# EAGLE board Top pHAT-Panel (EAGLE 9.6.2), part 1 of 2
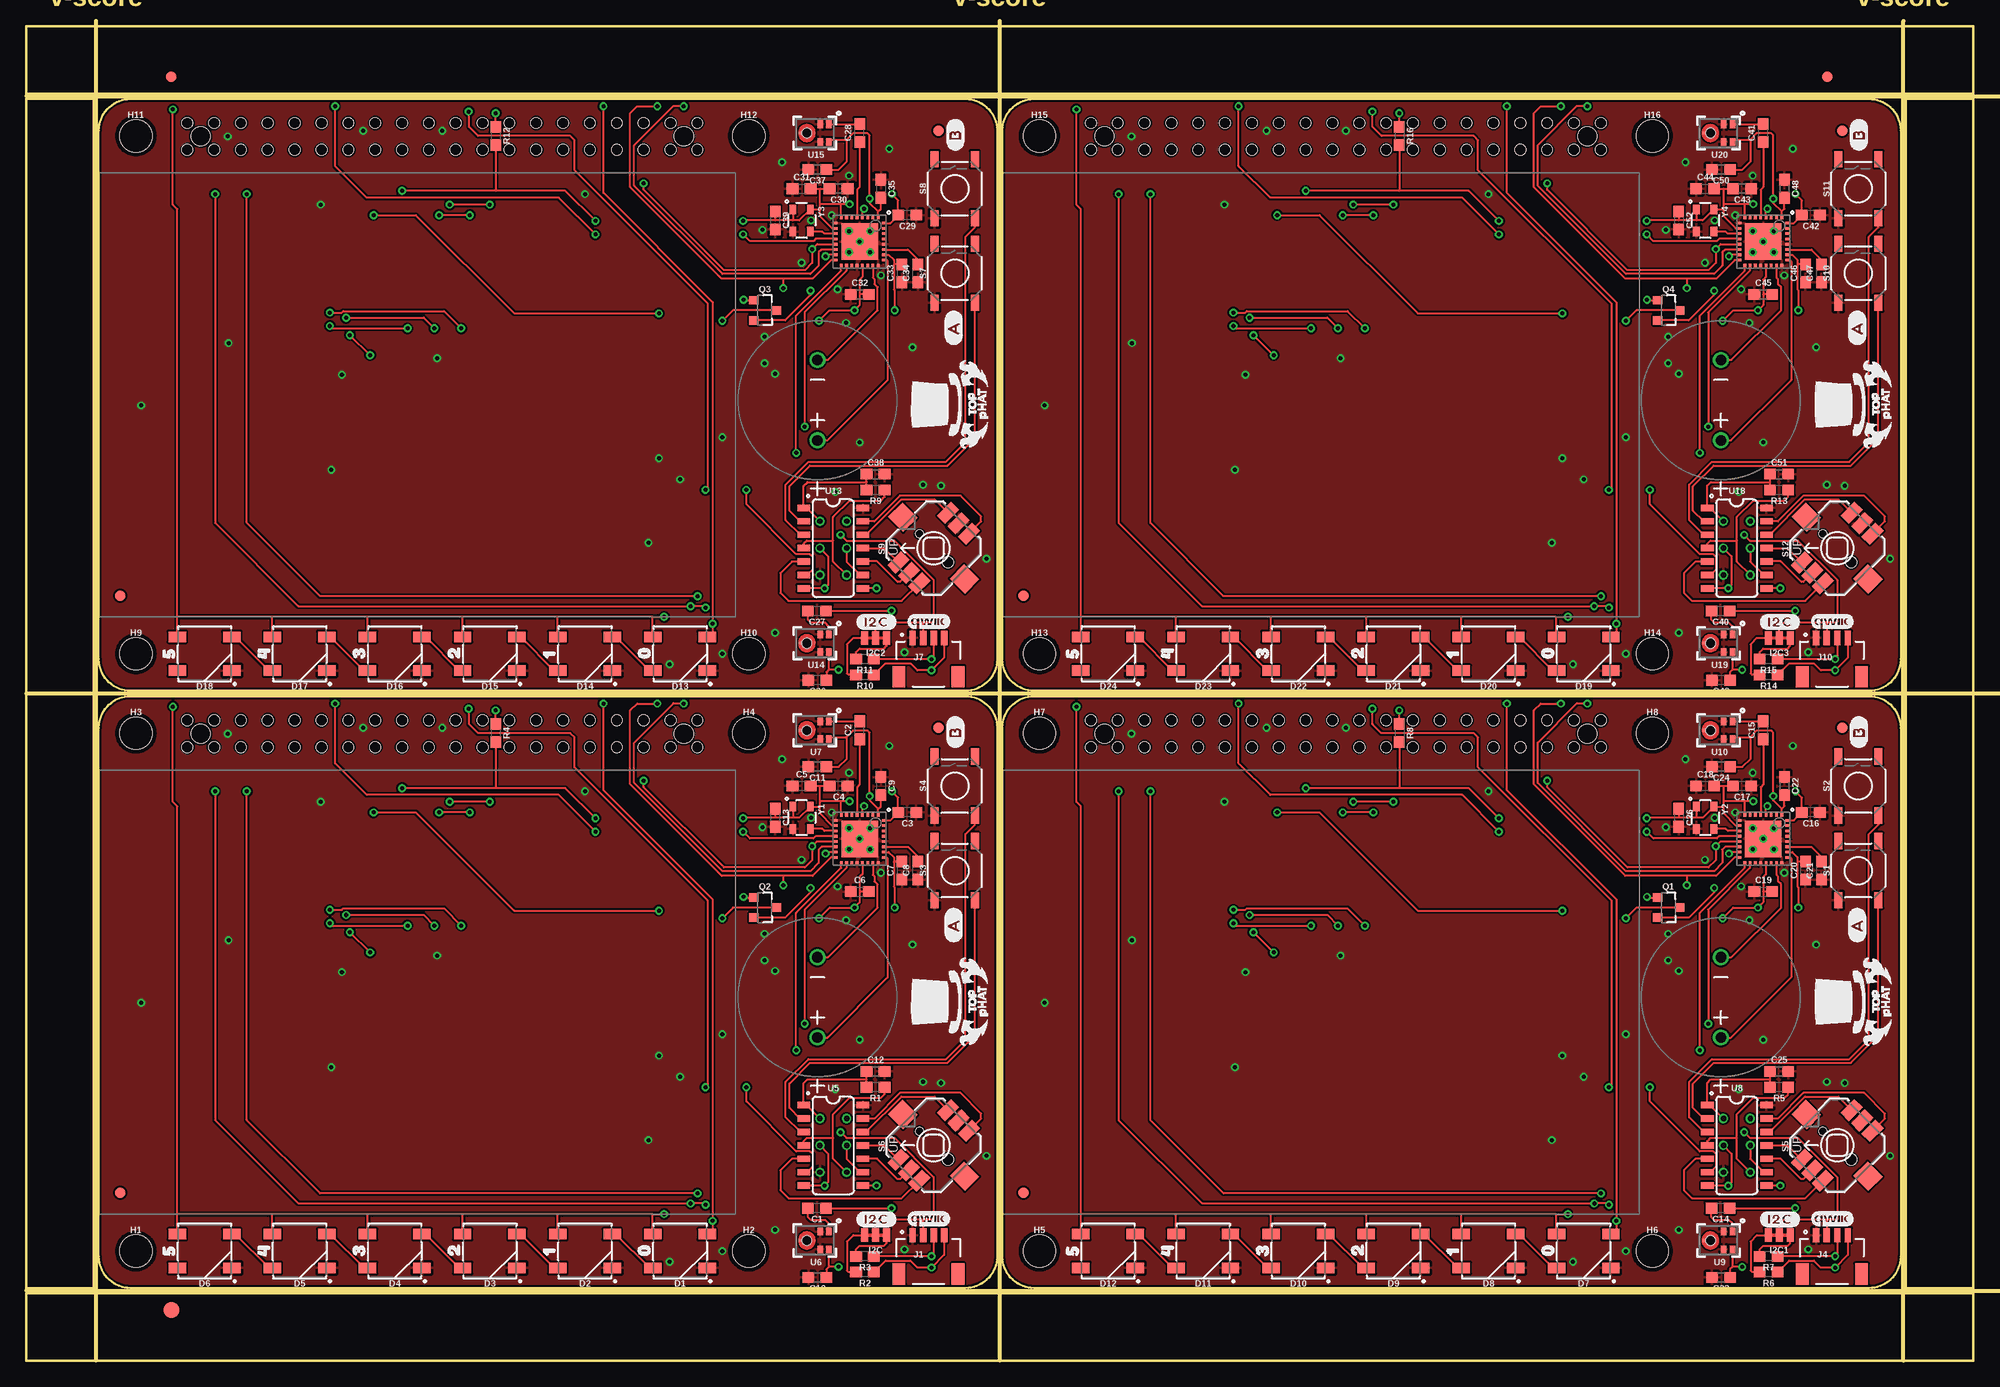
[diagram p0: board, top side]
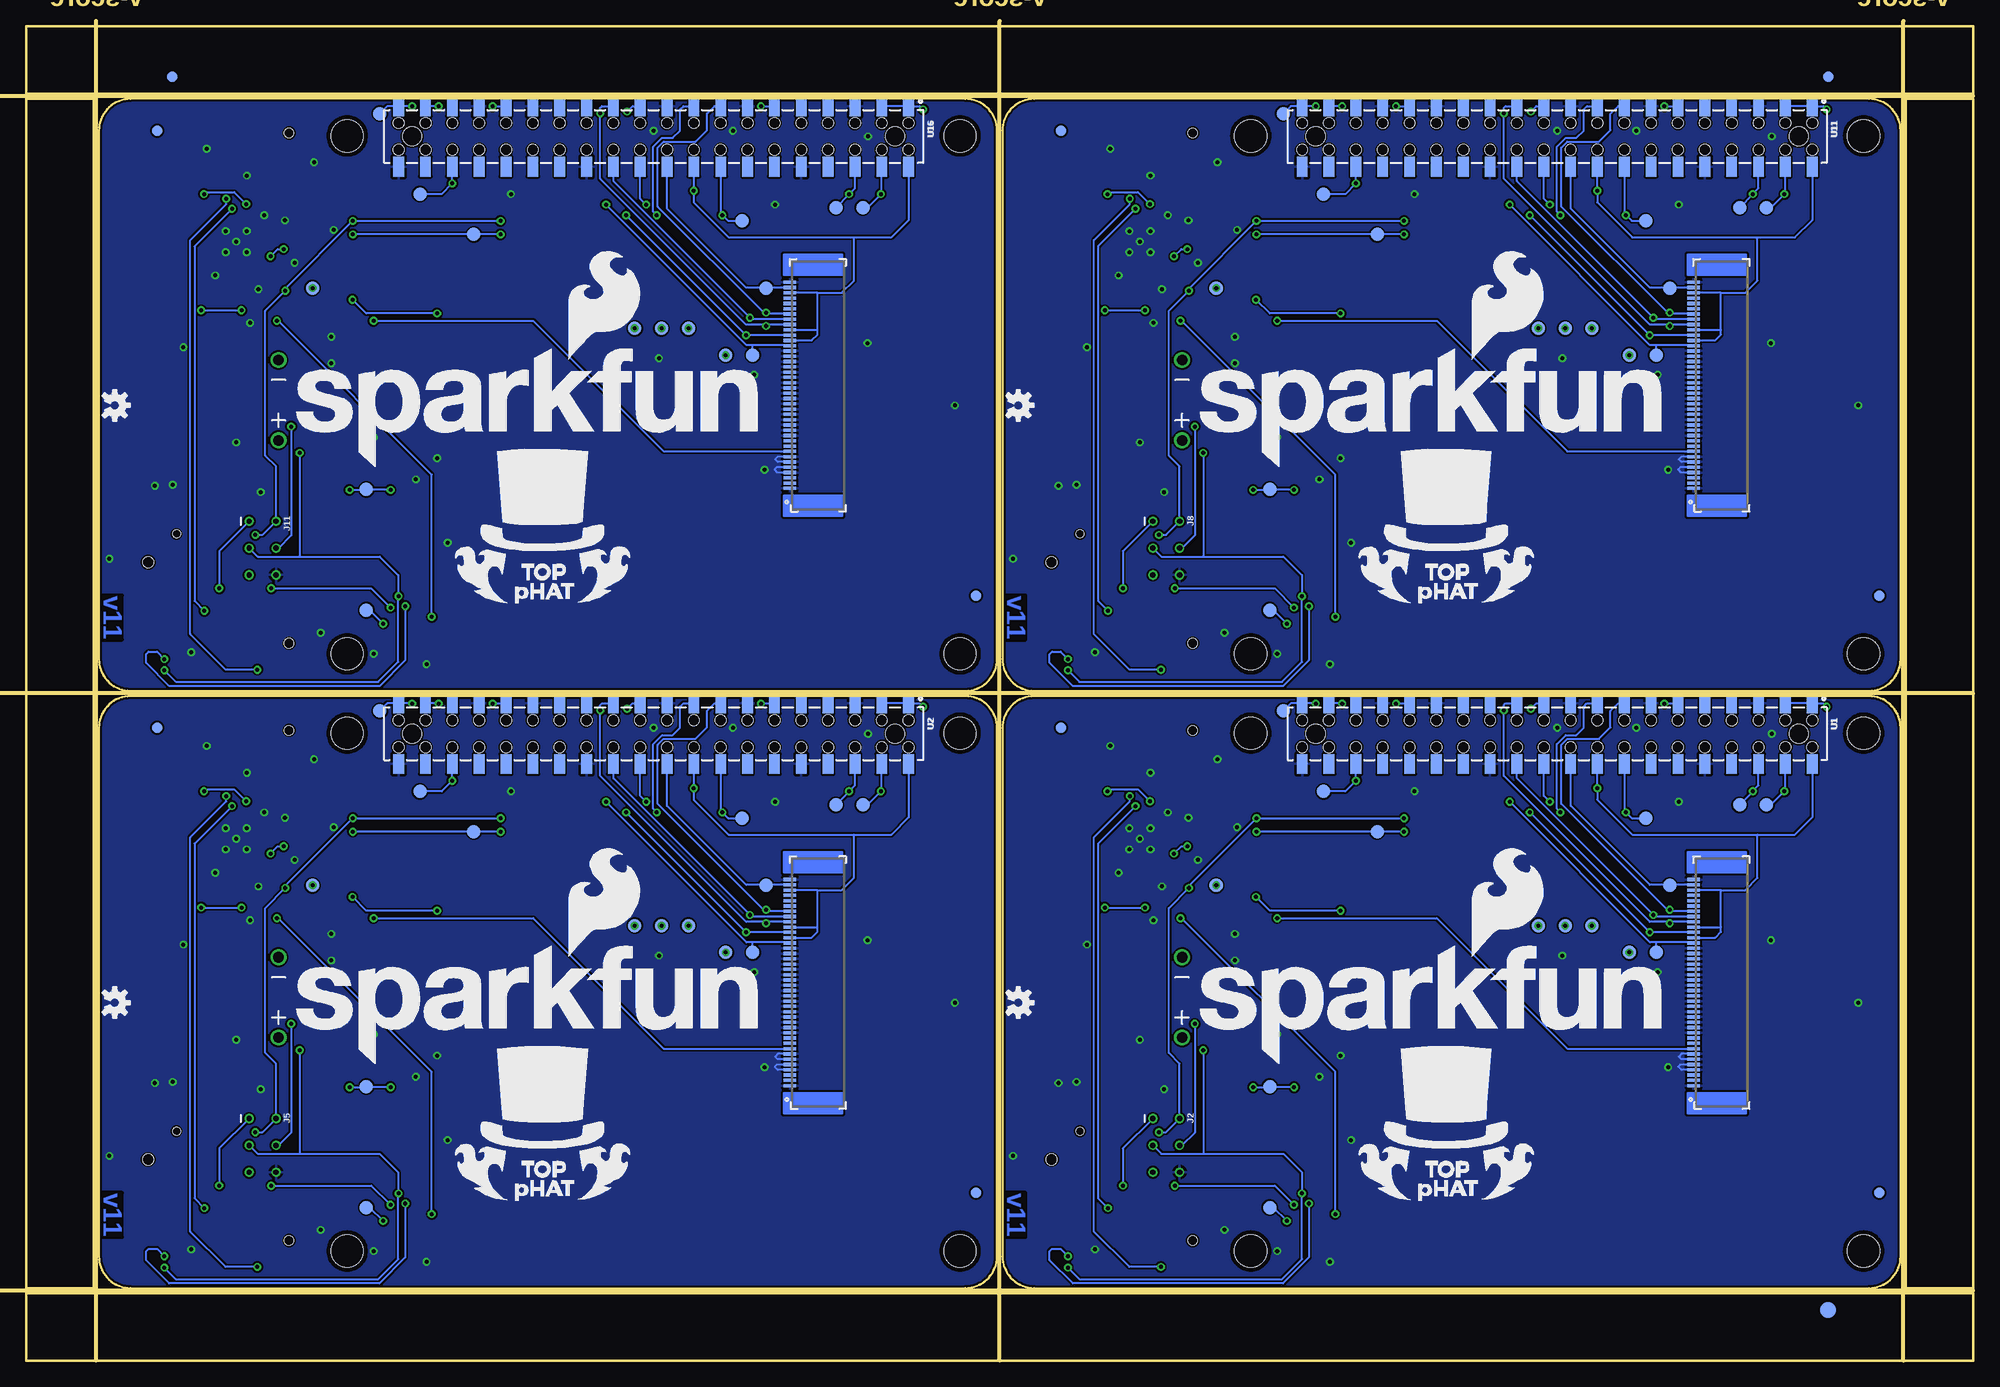
[diagram p1: board, bottom side, seen from below]

Size 184.22 x 126.22 mm. Coordinates in mm from the lower left corner, seen from the top.
Outline: 9.86,6.86 arc-90 6.86,9.86 6.86,59.86 arc-90 9.86,62.86 88.86,62.86 arc-90 91.86,59.86 91.86,9.86 arc-90 88.86,6.86 9.86,6.86
Outline: 95.37,6.86 arc-90 92.37,9.86 92.37,59.86 arc-90 95.37,62.86 174.37,62.86 arc-90 177.37,59.86 177.37,9.86 arc-90 174.37,6.86 95.37,6.86
Outline: 9.86,63.36 arc-90 6.86,66.36 6.86,116.37 arc-90 9.86,119.37 88.86,119.37 arc-90 91.86,116.37 91.86,66.36 arc-90 88.86,63.36 9.86,63.36
Outline: 95.37,63.36 arc-90 92.37,66.36 92.37,116.37 arc-90 95.37,119.37 174.37,119.37 arc-90 177.37,116.37 177.37,66.36 arc-90 174.37,63.36 95.37,63.36
Outline: 0,6.35 184.22,6.35 184.22,0 0,0 0,6.35
Outline: 177.87,119.37 184.22,119.37 184.22,6.86 177.87,6.86 177.87,119.37
Outline: 0,126.22 184.22,126.22 184.22,119.87 0,119.87 0,126.22
Outline: 0,119.37 6.35,119.37 6.35,6.86 0,6.86 0,119.37
Copper layers (1*16): Top 0.035mm / dielectric 1.5mm / Bottom 0.035mm
Design rules "Top pHAT": minimum track width 7mil, minimum drill 15mil, track to track 7mil, track to pad 7mil, pad to pad 7mil, via to via 7mil, smd to smd 7mil, copper to edge 7mil, drill to drill 7mil, minimum pad ring 7mil, minimum via ring 7mil, stop-mask expansion 4mil, vias tented up to drill 25mil, thermal gap 10mil
Milling: 6 lines

## Footprints (pad centres in the part's own frame; a part is rotated, then mirrored left to right if it is on the bottom)
0603 = smd 1.1 x 1: 1 -0.85,0; 2 0.85,0
WS2812B = smd 1.651 x 1: 1 2.577,-1.6; 2 2.577,1.6; 3 -2.577,1.6; 4 -2.577,-1.6
FIDUCIAL-1X2 = smd 1 x 1: 1 0,0
FIDUCIAL-1.5X3 = smd 1.5 x 1.5: 1 0,0
STAND-OFF-TIGHT = hole 3.048: 0,0
SMT-JUMPER_3_2-NC_TRACE_NO-SILK = smd 0.66 x 1.27: 1 -1.041,0; 2 0,0; 3 1.041,0
JST04_1MM_RA = smd 0.6 x 1.35: 1 -1.5,0; 2 -0.5,0; 3 0.5,0; 4 1.5,0 | smd 1.2 x 2: NC1 2.8,-3.675; NC2 -2.8,-3.675
2X3_TEST_POINTS = drill 0.508: 1 -2.54,-1.27; 2 -2.54,1.27; 3 0,-1.27; 4 0,1.27; 5 2.54,-1.27; 6 2.54,1.27
FPC05040-17204 = smd 0.3 x 1.2: 1 -9.75,0.6; 2 -9.25,0.6; 3 -8.75,0.6; 4 -8.25,0.6; 5 -7.75,0.6; 6 -7.25,0.6; 7 -6.75,0.6; 8 -6.25,0.6; 9 -5.75,0.6; 10 -5.25,0.6; 11 -4.75,0.6; 12 -4.25,0.6; 13 -3.75,0.6; 14 -3.25,0.6; 15 -2.75,0.6; 16 -2.25,0.6; 17 -1.75,0.6; 18 -1.25,0.6; 19 -0.75,0.6; 20 -0.25,0.6; 21 0.25,0.6; 22 0.75,0.6; 23 1.25,0.6; 24 1.75,0.6; 25 2.25,0.6; 26 2.75,0.6; 27 3.25,0.6; 28 3.75,0.6; 29 4.25,0.6; 30 4.75,0.6; 31 5.25,0.6; 32 5.75,0.6; 33 6.25,0.6; 34 6.75,0.6; 35 7.25,0.6; 36 7.75,0.6; 37 8.25,0.6; 38 8.75,0.6; 39 9.25,0.6; 40 9.75,0.6
CVS-1508_PCBSPKR = drill 1: + 0,3.8; - 0,-3.8
SOT23-3 = smd 0.8 x 0.9: 1 -0.95,-1; 2 0.95,-1; 3 0,1.1
TACTILE_SWITCH_SMD_5.2MM = smd 1.524 x 0.762: 1 -2.794,1.905; 2 2.794,1.905; 3 -2.794,-1.905; 4 2.794,-1.905
JOYSTICK_MINI = smd 1.85 x 1.1: A -3.325,1.4; B 3.325,1.4; C -3.325,-1.4; CTR -3.325,0; D 3.325,-1.4; GND 3.325,0 | smd 1.9 x 2: NC 0,4.13; NC@0 0,-4.13 | hole 0.75: 0,1.9 | hole 1.05: 0,-1.9
PAD.03X.05 = smd 1.27 x 1.27: P$1 0,0
RASPBERRY_PI_SHIELD_BOTTOM_ENTRY_NOHOLES = smd 1.02 x 1.87: 1 8.37,7.665; 2 8.37,1.935; 3 10.91,7.665; 4 10.91,1.935; 5 13.45,7.665; 6 13.45,1.935; 7 15.99,7.665; 8 15.99,1.935; 9 18.53,7.665; 10 18.53,1.935; 11 21.07,7.665; 12 21.07,1.935; 13 23.61,7.665; 14 23.61,1.935; 15 26.15,7.665; 16 26.15,1.935; 17 28.69,7.665; 18 28.69,1.935; 19 31.23,7.665; 20 31.23,1.935; 21 33.77,7.665; 22 33.77,1.935; 23 36.31,7.665; 24 36.31,1.935; 25 38.85,7.665; 26 38.85,1.935; 27 41.39,7.665; 28 41.39,1.935; 29 43.93,7.665; 30 43.93,1.935; 31 46.47,7.665; 32 46.47,1.935; 33 49.01,7.665; 34 49.01,1.935; 35 51.55,7.665; 36 51.55,1.935; 37 54.09,7.665; 38 54.09,1.935; 39 56.63,7.665; 40 56.63,1.935 | hole 1.02: 31.23,6.07; 31.23,3.53; 28.69,3.53; 28.69,6.07; 26.15,6.07; 26.15,3.53; 23.61,3.53; 23.61,6.07; 36.31,6.07; 36.31,3.53; 33.77,3.53; 33.77,6.07; 15.99,6.07; 15.99,3.53; 13.45,3.53; 13.45,6.07; 10.91,6.07; 10.91,3.53; 8.37,3.53; 8.37,6.07; 21.07,6.07; 21.07,3.53; 18.53,3.53; 18.53,6.07; 46.47,6.07; 46.47,3.53; 43.93,3.53; 43.93,6.07; 41.39,6.07; 41.39,3.53; 38.85,3.53; 38.85,6.07; 51.55,6.07; 51.55,3.53; 49.01,3.53; 49.01,6.07; 54.09,6.07; 56.63,6.07; 56.63,3.53; 54.09,3.53 | hole 1.8: 55.36,4.8; 9.64,4.8
QFN-32 = smd 0.4 x 0.25: 1 -2.3,1.75; 2 -2.3,1.25; 3 -2.3,0.75; 4 -2.3,0.25; 5 -2.3,-0.25; 6 -2.3,-0.75; 7 -2.3,-1.25; 8 -2.3,-1.75; 17 2.3,-1.75; 18 2.3,-1.25; 19 2.3,-0.75; 20 2.3,-0.25; 21 2.3,0.25; 22 2.3,0.75; 23 2.3,1.25; 24 2.3,1.75 | smd 0.25 x 0.4: 9 -1.75,-2.3; 10 -1.25,-2.3; 11 -0.75,-2.3; 12 -0.25,-2.3; 13 0.25,-2.3; 14 0.75,-2.3; 15 1.25,-2.3; 16 1.75,-2.3; 25 1.75,2.3; 26 1.25,2.3; 27 0.75,2.3; 28 0.25,2.3; 29 -0.25,2.3; 30 -0.75,2.3; 31 -1.25,2.3; 32 -1.75,2.3 | smd 3.45 x 3.45: PADDLE 0,0
SO14 = smd 0.6 x 1.2: 1 -3.81,-2.8; 2 -2.54,-2.8; 3 -1.27,-2.8; 4 0,-2.8; 5 1.27,-2.8; 6 2.54,-2.8; 7 3.81,-2.8; 8 3.81,2.8; 9 2.54,2.8; 10 1.27,2.8; 11 0,2.8; 12 -1.27,2.8; 13 -2.54,2.8; 14 -3.81,2.8
ICS40180 = smd 0.522 x 0.725: 1 -2.074,-0.838; 2 -1.252,-0.838; 4 -1.252,0.838; 5 -2.074,0.838 | smd 0.25 x 0.25: 3 0.66,-0.01 | hole 0.9: 0,0
RESONATOR-SMD-3.2X2.5 = smd 0.9 x 0.65: 1 -1.05,-0.825; 2 1.05,-0.825; 3 1.05,0.825; 4 -1.05,0.825

## Placement (x,y rotation side)
C1  2.2uF  [0603]  74.81,14.41 180 top
C2  2.2uF  [0603]  78.86,59.63 90 top
C3  0.1uF  [0603]  83.36,51.86 180 top
C4  0.1uF  [0603]  76.86,54.36 180 top
C5  0.1uF  [0603]  73.36,54.36 0 top
C6  4.7uF  [0603]  78.86,44.36 0 top
C7  4.7uF  [0603]  82.86,46.36 90 top
C8  4.7uF  [0603]  84.36,46.36 90 top
C9  4.7uF  [0603]  80.86,54.36 270 top
C10  0.1uF  [0603]  74.86,7.86 180 top
C11  0.1uF  [0603]  74.86,56.18 180 top
C12  0.1uF  [0603]  80.36,27.36 0 top
C13  10nF  [0603]  70.86,51.36 270 top
C14  2.2uF  [0603]  160.32,14.41 180 top
C15  2.2uF  [0603]  164.37,59.63 90 top
C16  0.1uF  [0603]  168.87,51.86 180 top
C17  0.1uF  [0603]  162.37,54.36 180 top
C18  0.1uF  [0603]  158.87,54.36 0 top
C19  4.7uF  [0603]  164.37,44.36 0 top
C20  4.7uF  [0603]  168.37,46.36 90 top
C21  4.7uF  [0603]  169.87,46.36 90 top
C22  4.7uF  [0603]  166.37,54.36 270 top
C23  0.1uF  [0603]  160.37,7.86 180 top
C24  0.1uF  [0603]  160.37,56.18 180 top
C25  0.1uF  [0603]  165.87,27.36 0 top
C26  10nF  [0603]  156.37,51.36 270 top
C27  2.2uF  [0603]  74.81,70.92 180 top
C28  2.2uF  [0603]  78.86,116.14 90 top
C29  0.1uF  [0603]  83.36,108.37 180 top
C30  0.1uF  [0603]  76.86,110.87 180 top
C31  0.1uF  [0603]  73.36,110.87 0 top
C32  4.7uF  [0603]  78.86,100.87 0 top
C33  4.7uF  [0603]  82.86,102.87 90 top
C34  4.7uF  [0603]  84.36,102.87 90 top
C35  4.7uF  [0603]  80.86,110.87 270 top
C36  0.1uF  [0603]  74.86,64.37 180 top
C37  0.1uF  [0603]  74.86,112.69 180 top
C38  0.1uF  [0603]  80.36,83.87 0 top
C39  10nF  [0603]  70.86,107.87 270 top
C40  2.2uF  [0603]  160.32,70.92 180 top
C41  2.2uF  [0603]  164.37,116.14 90 top
C42  0.1uF  [0603]  168.87,108.37 180 top
C43  0.1uF  [0603]  162.37,110.87 180 top
C44  0.1uF  [0603]  158.87,110.87 0 top
C45  4.7uF  [0603]  164.37,100.87 0 top
C46  4.7uF  [0603]  168.37,102.87 90 top
C47  4.7uF  [0603]  169.87,102.87 90 top
C48  4.7uF  [0603]  166.37,110.87 270 top
C49  0.1uF  [0603]  160.37,64.37 180 top
C50  0.1uF  [0603]  160.37,112.69 180 top
C51  0.1uF  [0603]  165.87,83.87 0 top
C52  10nF  [0603]  156.37,107.87 270 top
D1  WS2812B  [WS2812B]  61.86,10.36 180 top
D2  WS2812B  [WS2812B]  52.86,10.36 180 top
D3  WS2812B  [WS2812B]  43.86,10.36 180 top
D4  WS2812B  [WS2812B]  34.86,10.36 180 top
D5  WS2812B  [WS2812B]  25.86,10.36 180 top
D6  WS2812B  [WS2812B]  16.86,10.36 180 top
D7  WS2812B  [WS2812B]  147.37,10.36 180 top
D8  WS2812B  [WS2812B]  138.37,10.36 180 top
D9  WS2812B  [WS2812B]  129.37,10.36 180 top
D10  WS2812B  [WS2812B]  120.37,10.36 180 top
D11  WS2812B  [WS2812B]  111.37,10.36 180 top
D12  WS2812B  [WS2812B]  102.37,10.36 180 top
D13  WS2812B  [WS2812B]  61.86,66.87 180 top
D14  WS2812B  [WS2812B]  52.86,66.87 180 top
D15  WS2812B  [WS2812B]  43.86,66.87 180 top
D16  WS2812B  [WS2812B]  34.86,66.87 180 top
D17  WS2812B  [WS2812B]  25.86,66.87 180 top
D18  WS2812B  [WS2812B]  16.86,66.87 180 top
D19  WS2812B  [WS2812B]  147.37,66.87 180 top
D20  WS2812B  [WS2812B]  138.37,66.87 180 top
D21  WS2812B  [WS2812B]  129.37,66.87 180 top
D22  WS2812B  [WS2812B]  120.37,66.87 180 top
D23  WS2812B  [WS2812B]  111.37,66.87 180 top
D24  WS2812B  [WS2812B]  102.37,66.87 180 top
E$1  [FIDUCIAL-1X2]  13.72,121.46 0 top
E$2  [FIDUCIAL-1X2]  13.72,121.46 0 bottom
E$3  [FIDUCIAL-1X2]  170.44,121.46 0 top
E$4  [FIDUCIAL-1X2]  170.44,121.46 0 bottom
E$5  [FIDUCIAL-1.5X3]  13.72,4.76 0 top
E$6  [FIDUCIAL-1.5X3]  13.72,4.76 0 bottom
FD1  FIDUCIAL1X2  [FIDUCIAL-1X2]  8.86,15.86 0 top
FD2  FIDUCIAL1X2  [FIDUCIAL-1X2]  8.86,15.86 0 bottom
FD3  FIDUCIAL1X2  [FIDUCIAL-1X2]  86.32,59.86 0 top
FD4  FIDUCIAL1X2  [FIDUCIAL-1X2]  86.32,59.86 0 bottom
FD5  FIDUCIAL1X2  [FIDUCIAL-1X2]  94.37,15.86 0 top
FD6  FIDUCIAL1X2  [FIDUCIAL-1X2]  94.37,15.86 0 bottom
FD7  FIDUCIAL1X2  [FIDUCIAL-1X2]  171.83,59.86 0 top
FD8  FIDUCIAL1X2  [FIDUCIAL-1X2]  171.83,59.86 0 bottom
FD9  FIDUCIAL1X2  [FIDUCIAL-1X2]  8.86,72.37 0 top
FD10  FIDUCIAL1X2  [FIDUCIAL-1X2]  8.86,72.37 0 bottom
FD11  FIDUCIAL1X2  [FIDUCIAL-1X2]  86.32,116.37 0 top
FD12  FIDUCIAL1X2  [FIDUCIAL-1X2]  86.32,116.37 0 bottom
FD13  FIDUCIAL1X2  [FIDUCIAL-1X2]  94.37,72.37 0 top
FD14  FIDUCIAL1X2  [FIDUCIAL-1X2]  94.37,72.37 0 bottom
FD15  FIDUCIAL1X2  [FIDUCIAL-1X2]  171.83,116.37 0 top
FD16  FIDUCIAL1X2  [FIDUCIAL-1X2]  171.83,116.37 0 bottom
H1  STAND-OFFTIGHT  [STAND-OFF-TIGHT]  10.36,10.36 0 top
H2  STAND-OFFTIGHT  [STAND-OFF-TIGHT]  68.36,10.36 0 top
H3  STAND-OFFTIGHT  [STAND-OFF-TIGHT]  10.36,59.36 0 top
H4  STAND-OFFTIGHT  [STAND-OFF-TIGHT]  68.36,59.36 0 top
H5  STAND-OFFTIGHT  [STAND-OFF-TIGHT]  95.87,10.36 0 top
H6  STAND-OFFTIGHT  [STAND-OFF-TIGHT]  153.87,10.36 0 top
H7  STAND-OFFTIGHT  [STAND-OFF-TIGHT]  95.87,59.36 0 top
H8  STAND-OFFTIGHT  [STAND-OFF-TIGHT]  153.87,59.36 0 top
H9  STAND-OFFTIGHT  [STAND-OFF-TIGHT]  10.36,66.87 0 top
H10  STAND-OFFTIGHT  [STAND-OFF-TIGHT]  68.36,66.87 0 top
H11  STAND-OFFTIGHT  [STAND-OFF-TIGHT]  10.36,115.87 0 top
H12  STAND-OFFTIGHT  [STAND-OFF-TIGHT]  68.36,115.87 0 top
H13  STAND-OFFTIGHT  [STAND-OFF-TIGHT]  95.87,66.87 0 top
H14  STAND-OFFTIGHT  [STAND-OFF-TIGHT]  153.87,66.87 0 top
H15  STAND-OFFTIGHT  [STAND-OFF-TIGHT]  95.87,115.87 0 top
H16  STAND-OFFTIGHT  [STAND-OFF-TIGHT]  153.87,115.87 0 top
I2C  JUMPER-SMT_3_2-NC_TRACE_NO-SILK  [SMT-JUMPER_3_2-NC_TRACE_NO-SILK]  80.36,11.86 180 top
I2C1  JUMPER-SMT_3_2-NC_TRACE_NO-SILK  [SMT-JUMPER_3_2-NC_TRACE_NO-SILK]  165.87,11.86 180 top
I2C2  JUMPER-SMT_3_2-NC_TRACE_NO-SILK  [SMT-JUMPER_3_2-NC_TRACE_NO-SILK]  80.36,68.37 180 top
I2C3  JUMPER-SMT_3_2-NC_TRACE_NO-SILK  [SMT-JUMPER_3_2-NC_TRACE_NO-SILK]  165.87,68.37 180 top
J1  QWIIC  [JST04_1MM_RA]  85.36,11.86 0 top
J2  AVR_SPI_PROG_3X2TESTPOINTS  [2X3_TEST_POINTS]  76.36,20.36 270 bottom
J3  2.4" TFT  [FPC05040-17204]  25.86,35.76 90 bottom
J4  QWIIC  [JST04_1MM_RA]  170.87,11.86 0 top
J5  AVR_SPI_PROG_3X2TESTPOINTS  [2X3_TEST_POINTS]  161.87,20.36 270 bottom
J6  2.4" TFT  [FPC05040-17204]  111.37,35.76 90 bottom
J7  QWIIC  [JST04_1MM_RA]  85.36,68.37 0 top
J8  AVR_SPI_PROG_3X2TESTPOINTS  [2X3_TEST_POINTS]  76.36,76.87 270 bottom
J9  2.4" TFT  [FPC05040-17204]  25.86,92.27 90 bottom
J10  QWIIC  [JST04_1MM_RA]  170.87,68.37 0 top
J11  AVR_SPI_PROG_3X2TESTPOINTS  [2X3_TEST_POINTS]  161.87,76.87 270 bottom
J12  2.4" TFT  [FPC05040-17204]  111.37,92.27 90 bottom
LOGO1  SFE_LOGO_NAME_FLAME.4_INCH  [SFE_LOGO_NAME_FLAME_.4]  159.37,27.86 0 bottom
LOGO2  SFE_LOGO_NAME_FLAME.4_INCH  [SFE_LOGO_NAME_FLAME_.4]  73.86,27.86 0 bottom
LOGO3  QWIIC_LOGO_4MM  [QWIIC_4MM]  85.41,13.4 0 top
LOGO4  OSHW-LOGOS  [OSHW-LOGO-S]  90.36,33.86 270 bottom
LOGO5  QWIIC_LOGO_4MM  [QWIIC_4MM]  170.92,13.4 0 top
LOGO6  OSHW-LOGOS  [OSHW-LOGO-S]  175.87,33.86 270 bottom
LOGO7  SFE_LOGO_NAME_FLAME.4_INCH  [SFE_LOGO_NAME_FLAME_.4]  73.86,84.37 0 bottom
LOGO8  QWIIC_LOGO_4MM  [QWIIC_4MM]  85.41,69.91 0 top
LOGO9  OSHW-LOGOS  [OSHW-LOGO-S]  90.36,90.37 270 bottom
LOGO10  SFE_LOGO_NAME_FLAME.4_INCH  [SFE_LOGO_NAME_FLAME_.4]  159.37,84.37 0 bottom
LOGO11  QWIIC_LOGO_4MM  [QWIIC_4MM]  170.92,69.91 0 top
LOGO12  OSHW-LOGOS  [OSHW-LOGO-S]  175.87,90.37 270 bottom
LS1  CVS-1508  [CVS-1508_PCBSPKR]  160.37,34.36 180 top
LS2  CVS-1508  [CVS-1508_PCBSPKR]  74.86,34.36 180 top
LS3  CVS-1508  [CVS-1508_PCBSPKR]  74.86,90.87 180 top
LS4  CVS-1508  [CVS-1508_PCBSPKR]  160.37,90.87 180 top
Q1  1.1A/60V/600mΩ  [SOT23-3]  155.37,42.86 270 top
Q2  1.1A/60V/600mΩ  [SOT23-3]  69.86,42.86 270 top
Q3  1.1A/60V/600mΩ  [SOT23-3]  69.86,99.37 270 top
Q4  1.1A/60V/600mΩ  [SOT23-3]  155.37,99.37 270 top
R1  10k  [0603]  80.36,25.86 180 top
R2  4.7k  [0603]  79.36,8.36 180 top
R3  4.7k  [0603]  79.36,9.86 180 top
R4  10k  [0603]  44.41,59.36 270 top
R5  10k  [0603]  165.87,25.86 180 top
R6  4.7k  [0603]  164.87,8.36 180 top
R7  4.7k  [0603]  164.87,9.86 180 top
R8  10k  [0603]  129.92,59.36 270 top
R9  10k  [0603]  80.36,82.37 180 top
R10  4.7k  [0603]  79.36,64.87 180 top
R11  4.7k  [0603]  79.36,66.37 180 top
R12  10k  [0603]  44.41,115.87 270 top
R13  10k  [0603]  165.87,82.37 180 top
R14  4.7k  [0603]  164.87,64.87 180 top
R15  4.7k  [0603]  164.87,66.37 180 top
R16  10k  [0603]  129.92,115.87 270 top
S1  MOMENTARY-SWITCH-SPST-SMD-5.2MM-TALL  [TACTILE_SWITCH_SMD_5.2MM]  173.37,46.36 90 top
S2  MOMENTARY-SWITCH-SPST-SMD-5.2MM-TALL  [TACTILE_SWITCH_SMD_5.2MM]  173.37,54.36 90 top
S3  MOMENTARY-SWITCH-SPST-SMD-5.2MM-TALL  [TACTILE_SWITCH_SMD_5.2MM]  87.86,46.36 90 top
S4  MOMENTARY-SWITCH-SPST-SMD-5.2MM-TALL  [TACTILE_SWITCH_SMD_5.2MM]  87.86,54.36 90 top
S5  Joystick  [JOYSTICK_MINI]  171.37,20.36 45 top
S6  Joystick  [JOYSTICK_MINI]  85.86,20.36 45 top
S7  MOMENTARY-SWITCH-SPST-SMD-5.2MM-TALL  [TACTILE_SWITCH_SMD_5.2MM]  87.86,102.87 90 top
S8  MOMENTARY-SWITCH-SPST-SMD-5.2MM-TALL  [TACTILE_SWITCH_SMD_5.2MM]  87.86,110.87 90 top
S9  Joystick  [JOYSTICK_MINI]  85.86,76.87 45 top
S10  MOMENTARY-SWITCH-SPST-SMD-5.2MM-TALL  [TACTILE_SWITCH_SMD_5.2MM]  173.37,102.87 90 top
S11  MOMENTARY-SWITCH-SPST-SMD-5.2MM-TALL  [TACTILE_SWITCH_SMD_5.2MM]  173.37,110.87 90 top
S12  Joystick  [JOYSTICK_MINI]  171.37,76.87 45 top
TP1  TEST-POINT3X5  [PAD.03X.05]  22.1,52.58 0 bottom
TP2  TEST-POINT3X5  [PAD.03X.05]  19.56,52.58 0 bottom
TP3  TEST-POINT3X5  [PAD.03X.05]  28.72,44.96 0 bottom
TP4  TEST-POINT3X5  [PAD.03X.05]  29.99,38.61 0 bottom
TP5  TEST-POINT3X5  [PAD.03X.05]  38.61,41.15 0 bottom
TP6  TEST-POINT3X5  [PAD.03X.05]  36.07,41.15 0 bottom
TP7  TEST-POINT3X5  [PAD.03X.05]  66.55,14.48 0 bottom
TP8  TEST-POINT3X5  [PAD.03X.05]  56.39,50.04 0 bottom
TP9  TEST-POINT3X5  [PAD.03X.05]  61.47,53.85 0 bottom
TP10  TEST-POINT3X5  [PAD.03X.05]  71.63,44.96 0 bottom
TP11  TEST-POINT3X5  [PAD.03X.05]  65.28,61.47 0 bottom
TP12  TEST-POINT3X5  [PAD.03X.05]  30.99,51.31 0 bottom
TP13  TEST-POINT3X5  [PAD.03X.05]  41.15,41.15 0 bottom
TP14  TEST-POINT3X5  [PAD.03X.05]  32.53,38.61 0 bottom
TP15  TEST-POINT3X5  [PAD.03X.05]  66.55,25.91 0 bottom
TP16  TEST-POINT3X5  [PAD.03X.05]  107.61,52.58 0 bottom
TP17  TEST-POINT3X5  [PAD.03X.05]  105.07,52.58 0 bottom
TP18  TEST-POINT3X5  [PAD.03X.05]  114.23,44.96 0 bottom
TP19  TEST-POINT3X5  [PAD.03X.05]  115.5,38.61 0 bottom
TP20  TEST-POINT3X5  [PAD.03X.05]  124.12,41.15 0 bottom
TP21  TEST-POINT3X5  [PAD.03X.05]  121.58,41.15 0 bottom
TP22  TEST-POINT3X5  [PAD.03X.05]  152.06,14.48 0 bottom
TP23  TEST-POINT3X5  [PAD.03X.05]  141.9,50.04 0 bottom
TP24  TEST-POINT3X5  [PAD.03X.05]  146.98,53.85 0 bottom
TP25  TEST-POINT3X5  [PAD.03X.05]  157.14,44.96 0 bottom
TP26  TEST-POINT3X5  [PAD.03X.05]  150.79,61.47 0 bottom
TP27  TEST-POINT3X5  [PAD.03X.05]  116.5,51.31 0 bottom
TP28  TEST-POINT3X5  [PAD.03X.05]  126.66,41.15 0 bottom
TP29  TEST-POINT3X5  [PAD.03X.05]  118.04,38.61 0 bottom
TP30  TEST-POINT3X5  [PAD.03X.05]  152.06,25.91 0 bottom
TP31  TEST-POINT3X5  [PAD.03X.05]  22.1,109.09 0 bottom
TP32  TEST-POINT3X5  [PAD.03X.05]  19.56,109.09 0 bottom
TP33  TEST-POINT3X5  [PAD.03X.05]  28.72,101.47 0 bottom
TP34  TEST-POINT3X5  [PAD.03X.05]  29.99,95.12 0 bottom
TP35  TEST-POINT3X5  [PAD.03X.05]  38.61,97.66 0 bottom
TP36  TEST-POINT3X5  [PAD.03X.05]  36.07,97.66 0 bottom
TP37  TEST-POINT3X5  [PAD.03X.05]  66.55,70.99 0 bottom
TP38  TEST-POINT3X5  [PAD.03X.05]  56.39,106.55 0 bottom
TP39  TEST-POINT3X5  [PAD.03X.05]  61.47,110.36 0 bottom
TP40  TEST-POINT3X5  [PAD.03X.05]  71.63,101.47 0 bottom
TP41  TEST-POINT3X5  [PAD.03X.05]  65.28,117.98 0 bottom
TP42  TEST-POINT3X5  [PAD.03X.05]  30.99,107.82 0 bottom
TP43  TEST-POINT3X5  [PAD.03X.05]  41.15,97.66 0 bottom
TP44  TEST-POINT3X5  [PAD.03X.05]  32.53,95.12 0 bottom
TP45  TEST-POINT3X5  [PAD.03X.05]  66.55,82.42 0 bottom
TP46  TEST-POINT3X5  [PAD.03X.05]  107.61,109.09 0 bottom
TP47  TEST-POINT3X5  [PAD.03X.05]  105.07,109.09 0 bottom
TP48  TEST-POINT3X5  [PAD.03X.05]  114.23,101.47 0 bottom
TP49  TEST-POINT3X5  [PAD.03X.05]  115.5,95.12 0 bottom
TP50  TEST-POINT3X5  [PAD.03X.05]  124.12,97.66 0 bottom
TP51  TEST-POINT3X5  [PAD.03X.05]  121.58,97.66 0 bottom
TP52  TEST-POINT3X5  [PAD.03X.05]  152.06,70.99 0 bottom
TP53  TEST-POINT3X5  [PAD.03X.05]  141.9,106.55 0 bottom
TP54  TEST-POINT3X5  [PAD.03X.05]  146.98,110.36 0 bottom
TP55  TEST-POINT3X5  [PAD.03X.05]  157.14,101.47 0 bottom
TP56  TEST-POINT3X5  [PAD.03X.05]  150.79,117.98 0 bottom
TP57  TEST-POINT3X5  [PAD.03X.05]  116.5,107.82 0 bottom
TP58  TEST-POINT3X5  [PAD.03X.05]  126.66,97.66 0 bottom
TP59  TEST-POINT3X5  [PAD.03X.05]  118.04,95.12 0 bottom
TP60  TEST-POINT3X5  [PAD.03X.05]  152.06,82.42 0 bottom
U1  Raspberry Pi Header  [RASPBERRY_PI_SHIELD_BOTTOM_ENTRY_NOHOLES]  6.86,64.11 180 bottom
U2  Raspberry Pi Header  [RASPBERRY_PI_SHIELD_BOTTOM_ENTRY_NOHOLES]  92.37,64.11 180 bottom
U3  WM8960  [QFN-32]  164.37,49.36 270 top
U4  WM8960  [QFN-32]  78.86,49.36 270 top
U5  ATTINY84  [SO14]  76.36,20.36 270 top
U6  ICS40180  [ICS40180]  73.86,11.36 180 top
U7  ICS40180  [ICS40180]  73.86,59.63 180 top
U8  ATTINY84  [SO14]  161.87,20.36 270 top
U9  ICS40180  [ICS40180]  159.37,11.36 180 top
U10  ICS40180  [ICS40180]  159.37,59.63 180 top
U11  Raspberry Pi Header  [RASPBERRY_PI_SHIELD_BOTTOM_ENTRY_NOHOLES]  6.86,120.62 180 bottom
U12  WM8960  [QFN-32]  78.86,105.87 270 top
U13  ATTINY84  [SO14]  76.36,76.87 270 top
U14  ICS40180  [ICS40180]  73.86,67.87 180 top
U15  ICS40180  [ICS40180]  73.86,116.14 180 top
U16  Raspberry Pi Header  [RASPBERRY_PI_SHIELD_BOTTOM_ENTRY_NOHOLES]  92.37,120.62 180 bottom
U17  WM8960  [QFN-32]  164.37,105.87 270 top
U18  ATTINY84  [SO14]  161.87,76.87 270 top
U19  ICS40180  [ICS40180]  159.37,67.87 180 top
U20  ICS40180  [ICS40180]  159.37,116.14 180 top
U$1  [TOP_PHAT_LOGO_BIG]  50.04,22.1 0 bottom
U$2  [#B#0]  87.91,59.46 90 top
U$3  [#B#0]  173.42,59.46 90 top
U$4  [TOP_PHAT_LOGO_SMALL]  87.5,33.91 90 top
U$5  [#A#0]  173.27,41.2 90 top
U$6  [#I2C#0]  80.44,13.36 0 top
U$7  [#A#0]  87.76,41.2 90 top
U$8  [00]  58.5,10.49 90 top
U$9  [#I2C#0]  165.95,13.36 0 top
U$10  [00]  144.01,10.49 90 top
U$11  [10]  134.99,10.34 90 top
U$12  [20]  125.97,10.52 90 top
U$13  [10]  49.48,10.34 90 top
U$14  [20]  40.46,10.52 90 top
U$15  [30]  31.5,10.46 90 top
U$16  [40]  22.48,10.46 90 top
U$17  [50]  13.51,10.44 90 top
U$18  [30]  117.01,10.46 90 top
U$19  [40]  107.99,10.46 90 top
U$20  [50]  99.02,10.44 90 top
U$21  [TOP_PHAT_LOGO_SMALL]  173.01,33.91 90 top
U$22  [TOP_PHAT_LOGO_BIG]  135.55,22.1 0 bottom
U$23  [#B#0]  87.91,115.97 90 top
U$24  [#A#0]  87.76,97.71 90 top
U$25  [#I2C#0]  80.44,69.87 0 top
U$26  [00]  58.5,67 90 top
U$27  [10]  49.48,66.85 90 top
U$28  [20]  40.46,67.02 90 top
U$29  [30]  31.5,66.97 90 top
U$30  [40]  22.48,66.97 90 top
U$31  [50]  13.51,66.95 90 top
U$32  [TOP_PHAT_LOGO_SMALL]  87.5,90.42 90 top
U$33  [TOP_PHAT_LOGO_BIG]  50.04,78.61 0 bottom
U$34  [#B#0]  173.42,115.97 90 top
U$35  [#A#0]  173.27,97.71 90 top
U$36  [#I2C#0]  165.95,69.87 0 top
U$37  [00]  144.01,67 90 top
U$38  [10]  134.99,66.85 90 top
U$39  [20]  125.97,67.02 90 top
U$40  [30]  117.01,66.97 90 top
U$41  [40]  107.99,66.97 90 top
U$42  [50]  99.02,66.95 90 top
U$43  [TOP_PHAT_LOGO_SMALL]  173.01,90.42 90 top
U$44  [TOP_PHAT_LOGO_BIG]  135.55,78.61 0 bottom
Y1  24 MHz  [RESONATOR-SMD-3.2X2.5]  73.36,51.36 270 top
Y2  24 MHz  [RESONATOR-SMD-3.2X2.5]  158.87,51.36 270 top
Y3  24 MHz  [RESONATOR-SMD-3.2X2.5]  73.36,107.87 270 top
Y4  24 MHz  [RESONATOR-SMD-3.2X2.5]  158.87,107.87 270 top

## Library data of the parts
C1 C2 C14 C15 C27 C28 C40 C41 = SparkFun-Capacitors; PROD_ID: CAP-07888
C3-C5 C10-C12 C16-C18 C23-C25 C29-C31 C36-C38 C42-C44 C49-C51 = SparkFun-Capacitors; PROD_ID: CAP-00810
C6-C9 C19-C22 C32-C35 C45-C48 = SparkFun-Capacitors; PROD_ID: CAP-08280
C13 C26 C39 C52 = SparkFun-Capacitors; PROD_ID: CAP-00867
D1-D24 = SparkFun-LED; PROD_ID: DIO-12503
E$1-E$4 FD1-FD16 LOGO1-LOGO12 = SparkFun-Aesthetics
E$5 E$6 = SparkFun-Retired
H1-H16 = SparkFun-Hardware
I2C I2C1-I2C3 = SparkFun-Jumpers
J1 J4 J7 J10 = SparkFun-Connectors; PROD_ID: CONN-13694
J2 J5 J8 J11 TP1-TP60 = SparkFun-Connectors
J3 J6 J9 J12 = SparkFun-Displays; PROD_ID: LCD-14913; PROD_ID1: CONN-14082
LS1-LS4 = SparkFun-Electromechanical; PROD_ID: COM-14823
Q1-Q4 = SparkFun-DiscreteSemi; PROD_ID: TRANS-08285
R1 R4 R5 R8 R9 R12 R13 R16 = SparkFun-Resistors; PROD_ID: RES-00824
R2 R3 R6 R7 R10 R11 R14 R15 = SparkFun-Resistors; PROD_ID: RES-07857
S1-S4 S7 S8 S10 S11 = SparkFun-Switches; PROD_ID: SWCH-14139
S5 S6 S9 S12 = SparkFun-Switches; PROD_ID: SWCH-09905; SF_SKU: COM-10063
U1 U2 U11 U16 = SparkFun-Connectors; PROD_ID: CONN-13790
U3 U4 U12 U17 = SparkFun-IC-Special-Function; PROD_ID: IC-14824
U5 U8 U13 U18 = SparkFun-IC-Microcontroller; PROD_ID: IC-11285
U6 U7 U9 U10 U14 U15 U19 U20 = ICS-40180; PROD_ID: IC-15819
U$1 U$4 U$21 U$22 U$32 U$33 U$43 U$44 = top_phat_logo
U$2 U$3 U$5-U$20 U$23-U$31 U$34-U$42 = output
Y1-Y4 = SparkFun-Clocks; PROD_ID: XTAL-14907

## Nets
3.3V: C3.2 C4.2 C5.2 C12.1 C13.1 I2C.2 J1.2 J2.2 J3.29 J3.31 J3.38 Q2.2 R1.2 R4.2 U1.1 U1.17 U4.8 U4.10 U4.32 U5.1 Y1.1 Y1.4
3.3V1: C16.2 C17.2 C18.2 C25.1 C26.1 I2C1.2 J4.2 J5.2 J6.29 J6.31 J6.38 Q1.2 R5.2 R8.2 U2.1 U2.17 U3.8 U3.10 U3.32 U8.1 Y2.1 Y2.4
3.3V2: C29.2 C30.2 C31.2 C38.1 C39.1 I2C2.2 J7.2 J8.2 J9.29 J9.31 J9.38 Q3.2 R9.2 R12.2 U11.1 U11.17 U12.8 U12.10 U12.32 U13.1 Y3.1 Y3.4
3.3V3: C42.2 C43.2 C44.2 C51.1 C52.1 I2C3.2 J10.2 J11.2 J12.29 J12.31 J12.38 Q4.2 R13.2 R16.2 U16.1 U16.17 U17.8 U17.10 U17.32 U18.1 Y4.1 Y4.4
5V: C6.2 C7.2 D1.1 D2.1 D3.1 D4.1 D5.1 D6.1 U1.2 U1.4 U4.21 U4.26
5V1: C19.2 C20.2 D7.1 D8.1 D9.1 D10.1 D11.1 D12.1 U2.2 U2.4 U3.21 U3.26
5V2: C32.2 C33.2 D13.1 D14.1 D15.1 D16.1 D17.1 D18.1 U11.2 U11.4 U12.21 U12.26
5V3: C45.2 C46.2 D19.1 D20.1 D21.1 D22.1 D23.1 D24.1 U16.2 U16.4 U17.21 U17.26
!BKLITE: Q2.1 TP12.P$1 U1.15
!BKLITE1: Q1.1 TP27.P$1 U2.15
!BKLITE2: Q3.1 TP42.P$1 U11.15
!BKLITE3: Q4.1 TP57.P$1 U16.15
!CS: J3.32 R4.1 TP6.P$1 U1.24
!CS1: J6.32 R8.1 TP21.P$1 U2.24
!CS2: J9.32 R12.1 TP36.P$1 U11.24
!CS3: J12.32 R16.1 TP51.P$1 U16.24
!INT: TP15.P$1 U1.22 U5.6
!INT1: TP30.P$1 U2.22 U8.6
!INT2: TP45.P$1 U11.22 U13.6
!INT3: TP60.P$1 U16.22 U18.6
!RST_ATTINY: J2.5 R1.1 U5.4
!RST_ATTINY1: J5.5 R5.1 U8.4
!RST_ATTINY2: J8.5 R9.1 U13.4
!RST_ATTINY3: J11.5 R13.1 U18.4
!RST_SCREEN: J3.34 TP13.P$1 U1.16
!RST_SCREEN1: J6.34 TP28.P$1 U2.16
!RST_SCREEN2: J9.34 TP43.P$1 U11.16
!RST_SCREEN3: J12.34 TP58.P$1 U16.16
ADC-DAT: TP10.P$1 U1.38 U4.16
ADC-DAT1: TP25.P$1 U2.38 U3.16
ADC-DAT2: TP40.P$1 U11.38 U12.16
ADC-DAT3: TP55.P$1 U16.38 U17.16
BCLK: TP8.P$1 U1.12 U4.12
BCLK1: TP23.P$1 U2.12 U3.12
BCLK2: TP38.P$1 U11.12 U12.12
BCLK3: TP53.P$1 U16.12 U17.12
BTN_A: S3.3 U5.2
BTN_A1: S1.3 U8.2
BTN_A2: S7.3 U13.2
BTN_A3: S10.3 U18.2
BTN_B: S4.3 U5.3
BTN_B1: S2.3 U8.3
BTN_B2: S8.3 U13.3
BTN_B3: S11.3 U18.3
BTN_CENTER: S6.CTR U5.10
BTN_CENTER1: S5.CTR U8.10
BTN_CENTER2: S9.CTR U13.10
BTN_CENTER3: S12.CTR U18.10
BTN_DOWN: S6.D U5.13
BTN_DOWN1: S5.D U8.13
BTN_DOWN2: S9.D U13.13
BTN_DOWN3: S12.D U18.13
BTN_LEFT: S6.C U5.5
BTN_LEFT1: S5.C U8.5
BTN_LEFT2: S9.C U13.5
BTN_LEFT3: S12.C U18.5
BTN_RIGHT: S6.B U5.12
BTN_RIGHT1: S5.B U8.12
BTN_RIGHT2: S9.B U13.12
BTN_RIGHT3: S12.B U18.12
BTN_UP: S6.A U5.11
BTN_UP1: S5.A U8.11
BTN_UP2: S9.A U13.11
BTN_UP3: S12.A U18.11
D/C: J3.30 TP14.P$1 U1.18
D/C1: J6.30 TP29.P$1 U2.18
D/C2: J9.30 TP44.P$1 U11.18
D/C3: J12.30 TP59.P$1 U16.18
DAC-DAT: TP11.P$1 U1.40 U4.14
DAC-DAT1: TP26.P$1 U2.40 U3.14
DAC-DAT2: TP41.P$1 U11.40 U12.14
DAC-DAT3: TP56.P$1 U16.40 U17.14
DAC-LRC: TP9.P$1 U1.35 U4.13 U4.15
DAC-LRC1: TP24.P$1 U2.35 U3.13 U3.15
DAC-LRC2: TP39.P$1 U11.35 U12.13 U12.15
DAC-LRC3: TP54.P$1 U16.35 U17.13 U17.15
GND: C3.1 C4.1 C5.1 C6.1 C7.1 C8.1 C9.1 C10.2 C11.2 C12.2 C13.2 D1.3 D2.3 D3.3 D4.3 D5.3 D6.3 J1.1 J2.6 J3.1 J3.4 J3.5 J3.6 J3.7 J3.11 J3.12 J3.13 J3.14 J3.15 J3.16 J3.17 J3.18 J3.19 J3.20 J3.21 J3.22 J3.23 J3.24 J3.25 J3.26 J3.27 J3.40 S3.1 S4.1 S6.GND U1.6 U1.9 U1.14 U1.20 U1.25 U1.30 U1.34 U1.39 U4.9 U4.20 U4.24 U4.28 U4.PADDLE U5.14 U6.2 U6.3 U6.4 U7.2 U7.3 U7.4 Y1.2
GND1: C16.1 C17.1 C18.1 C19.1 C20.1 C21.1 C22.1 C23.2 C24.2 C25.2 C26.2 D7.3 D8.3 D9.3 D10.3 D11.3 D12.3 J4.1 J5.6 J6.1 J6.4 J6.5 J6.6 J6.7 J6.11 J6.12 J6.13 J6.14 J6.15 J6.16 J6.17 J6.18 J6.19 J6.20 J6.21 J6.22 J6.23 J6.24 J6.25 J6.26 J6.27 J6.40 S1.1 S2.1 S5.GND U2.6 U2.9 U2.14 U2.20 U2.25 U2.30 U2.34 U2.39 U3.9 U3.20 U3.24 U3.28 U3.PADDLE U8.14 U9.2 U9.3 U9.4 U10.2 U10.3 U10.4 Y2.2
GND2: C29.1 C30.1 C31.1 C32.1 C33.1 C34.1 C35.1 C36.2 C37.2 C38.2 C39.2 D13.3 D14.3 D15.3 D16.3 D17.3 D18.3 J7.1 J8.6 J9.1 J9.4 J9.5 J9.6 J9.7 J9.11 J9.12 J9.13 J9.14 J9.15 J9.16 J9.17 J9.18 J9.19 J9.20 J9.21 J9.22 J9.23 J9.24 J9.25 J9.26 J9.27 J9.40 S7.1 S8.1 S9.GND U11.6 U11.9 U11.14 U11.20 U11.25 U11.30 U11.34 U11.39 U12.9 U12.20 U12.24 U12.28 U12.PADDLE U13.14 U14.2 U14.3 U14.4 U15.2 U15.3 U15.4 Y3.2
GND3: C42.1 C43.1 C44.1 C45.1 C46.1 C47.1 C48.1 C49.2 C50.2 C51.2 C52.2 D19.3 D20.3 D21.3 D22.3 D23.3 D24.3 J10.1 J11.6 J12.1 J12.4 J12.5 J12.6 J12.7 J12.11 J12.12 J12.13 J12.14 J12.15 J12.16 J12.17 J12.18 J12.19 J12.20 J12.21 J12.22 J12.23 J12.24 J12.25 J12.26 J12.27 J12.40 S10.1 S11.1 S12.GND U16.6 U16.9 U16.14 U16.20 U16.25 U16.30 U16.34 U16.39 U17.9 U17.20 U17.24 U17.28 U17.PADDLE U18.14 U19.2 U19.3 U19.4 U20.2 U20.3 U20.4 Y4.2
LED_DATA: D1.4 TP7.P$1 U1.32
LED_DATA1: D7.4 TP22.P$1 U2.32
LED_DATA2: D13.4 TP37.P$1 U11.32
LED_DATA3: D19.4 TP52.P$1 U16.32
LEFTMIC: C1.2 U6.1
LEFTMIC1: C14.2 U9.1
LEFTMIC2: C27.2 U14.1
LEFTMIC3: C40.2 U19.1
MICBIAS: C9.2 C10.1 C11.1 U4.1 U6.5 U7.5
MICBIAS1: C22.2 C23.1 C24.1 U3.1 U9.5 U10.5
MICBIAS2: C35.2 C36.1 C37.1 U12.1 U14.5 U15.5
MICBIAS3: C48.2 C49.1 C50.1 U17.1 U19.5 U20.5
MISO: J2.1 U5.8
MISO1: J5.1 U8.8
MISO2: J8.1 U13.8
MISO3: J11.1 U18.8
N$1: D3.2 D4.4
N$2: D4.2 D5.4
N$3: D5.2 D6.4
N$4: J3.8 Q2.3
N$5: LS1.- U3.23
N$6: LS2.+ U4.25
N$7: LS1.+ U3.25
N$8: D1.2 D2.4
N$9: D2.2 D3.4
N$10: C14.1 U3.4
N$11: U4.11 Y1.3
N$12: C15.1 U3.5
N$13: C21.2 U3.27
N$14: I2C1.3 R6.2
N$15: I2C1.1 R7.2
N$16: I2C.3 R2.2
N$17: I2C.1 R3.2
N$18: D7.2 D8.4
N$19: D8.2 D9.4
N$20: D9.2 D10.4
N$21: D10.2 D11.4
N$22: LS2.- U4.23
N$23: D11.2 D12.4
N$24: J6.8 Q1.3
N$25: U3.11 Y2.3
N$26: LS3.- U12.23
N$27: LS3.+ U12.25
N$28: C27.1 U12.4
N$29: C1.1 U4.4
N$30: C2.1 U4.5
N$31: C28.1 U12.5
N$32: C34.2 U12.27
N$33: I2C2.3 R10.2
N$34: I2C2.1 R11.2
N$35: D13.2 D14.4
N$36: D14.2 D15.4
N$37: D15.2 D16.4
N$38: C8.2 U4.27
N$39: D16.2 D17.4
N$40: D17.2 D18.4
N$41: J9.8 Q3.3
N$42: U12.11 Y3.3
N$43: LS4.- U17.23
N$44: LS4.+ U17.25
N$45: C40.1 U17.4
N$46: C41.1 U17.5
N$47: C47.2 U17.27
N$48: I2C3.3 R14.2
N$49: I2C3.1 R15.2
N$50: D19.2 D20.4
N$51: D20.2 D21.4
N$52: D21.2 D22.4
N$53: D22.2 D23.4
N$54: D23.2 D24.4
N$55: J12.8 Q4.3
N$56: U17.11 Y4.3
RIGHTMIC: C2.2 U7.1
RIGHTMIC1: C15.2 U10.1
RIGHTMIC2: C28.2 U15.1
RIGHTMIC3: C41.2 U20.1
SCK: J3.33 TP5.P$1 U1.23
SCK1: J6.33 TP20.P$1 U2.23
SCK2: J9.33 TP35.P$1 U11.23
SCK3: J12.33 TP50.P$1 U16.23
SCL: J1.4 J2.3 R2.1 TP1.P$1 U1.5 U4.17 U5.9
SCL1: J4.4 J5.3 R6.1 TP16.P$1 U2.5 U3.17 U8.9
SCL2: J7.4 J8.3 R10.1 TP31.P$1 U11.5 U12.17 U13.9
SCL3: J10.4 J11.3 R14.1 TP46.P$1 U16.5 U17.17 U18.9
SDA: J1.3 J2.4 R3.1 TP2.P$1 U1.3 U4.18 U5.7
SDA1: J4.3 J5.4 R7.1 TP17.P$1 U2.3 U3.18 U8.7
SDA2: J7.3 J8.4 R11.1 TP32.P$1 U11.3 U12.18 U13.7
SDA3: J10.3 J11.4 R15.1 TP47.P$1 U16.3 U17.18 U18.7
SDI: J3.39 TP3.P$1 U1.19
SDI1: J6.39 TP18.P$1 U2.19
SDI2: J9.39 TP33.P$1 U11.19
SDI3: J12.39 TP48.P$1 U16.19
SDO: J3.28 TP4.P$1 U1.21
SDO1: J6.28 TP19.P$1 U2.21
SDO2: J9.28 TP34.P$1 U11.21
SDO3: J12.28 TP49.P$1 U16.21